# Altium PCB pcb.PCBDOC
Units mm, origin at the board's own origin, x right, y up, seen from the top; angles counter-clockwise.
Board outline 95.9 x 90.2 mm, 2 copper layers (TopLayer, BottomLayer), stack 1.671 mm thick; 69 components, 109 nets, 459 pads, 446 vias.
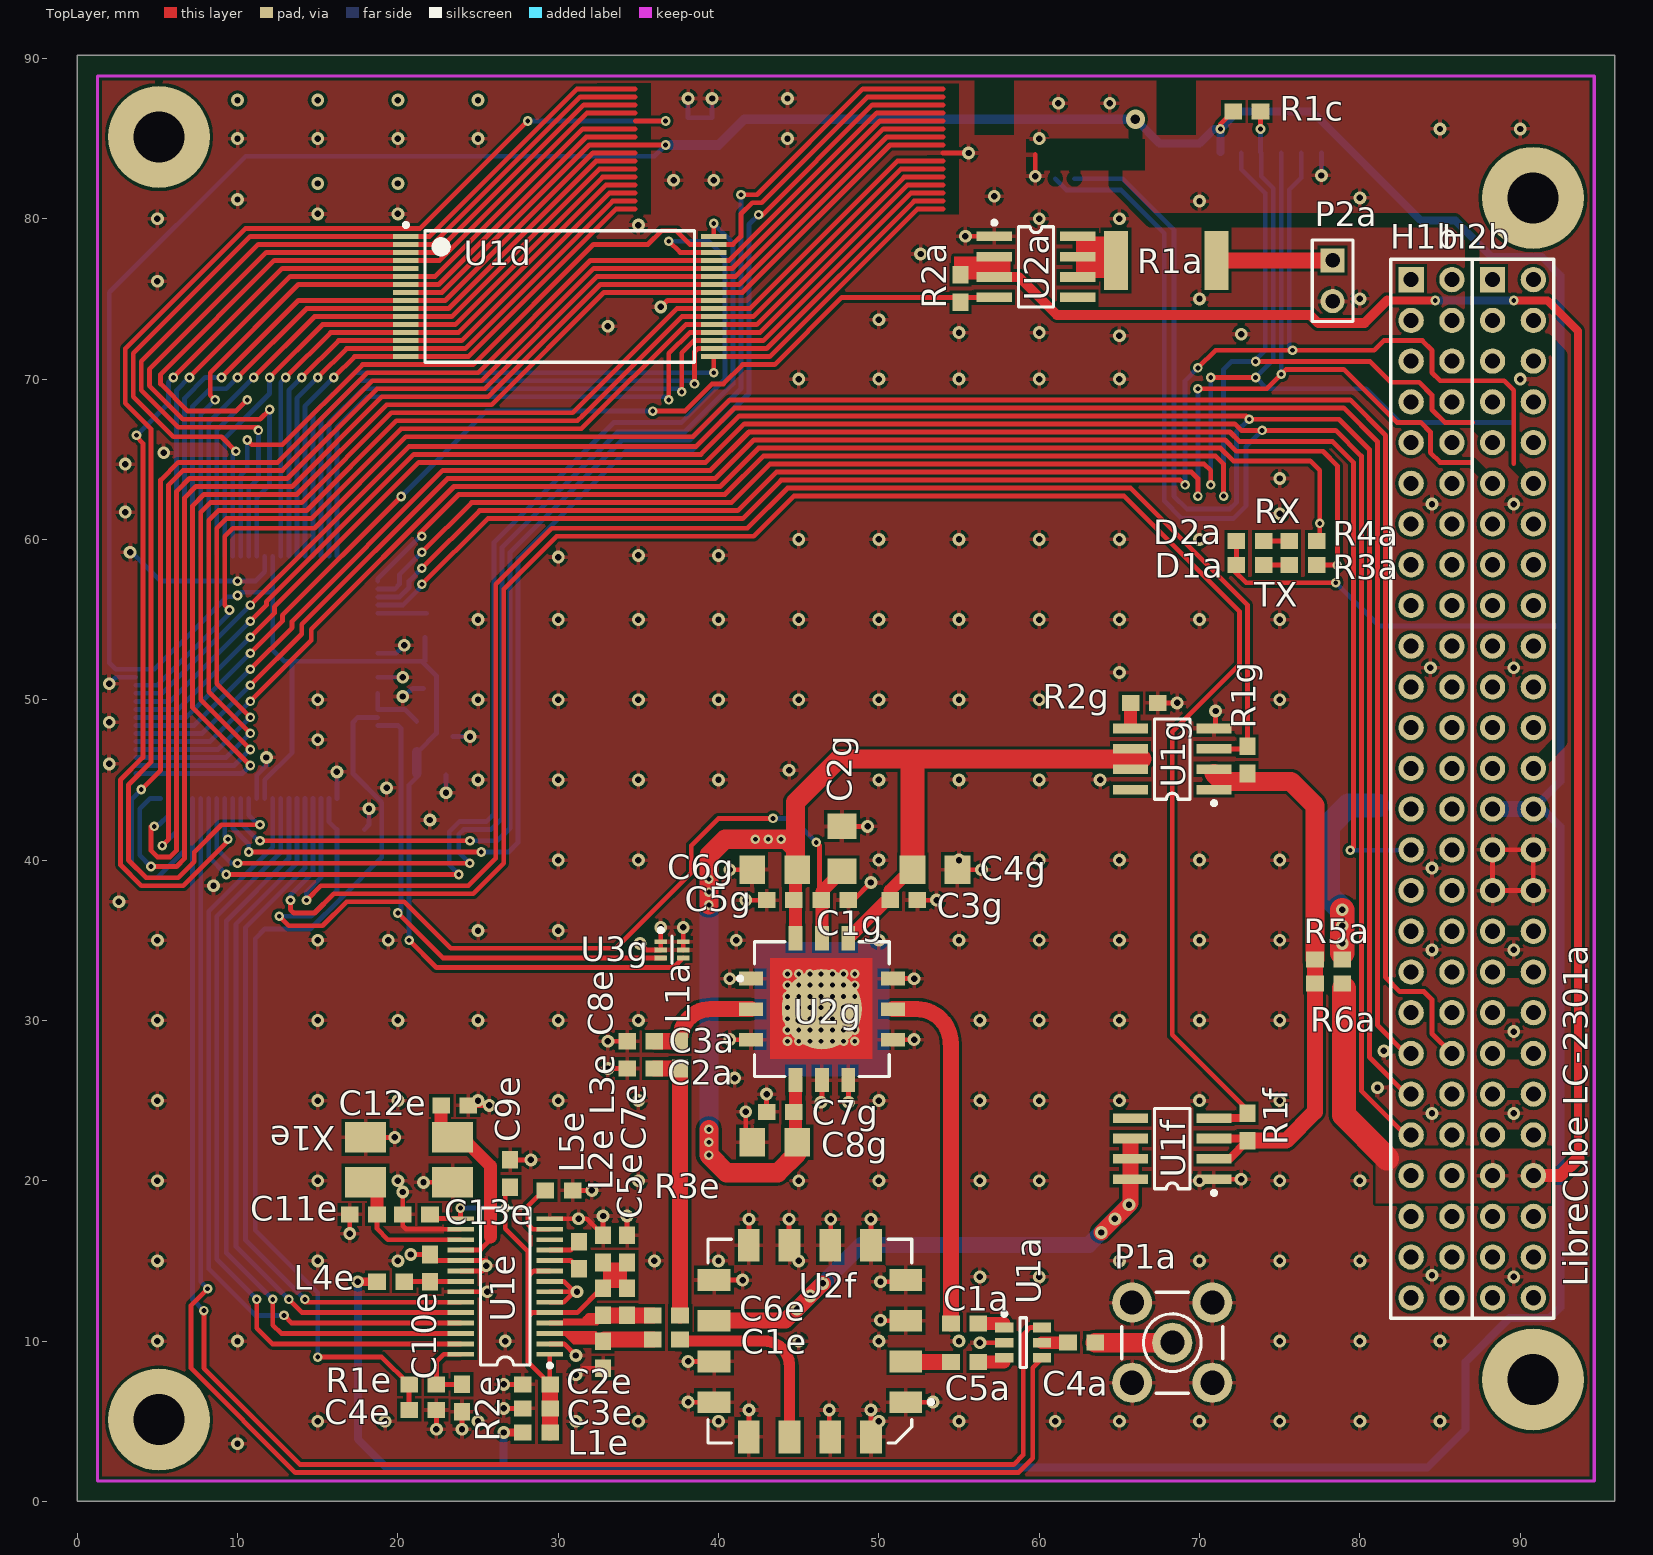
[diagram p0: TopLayer view]
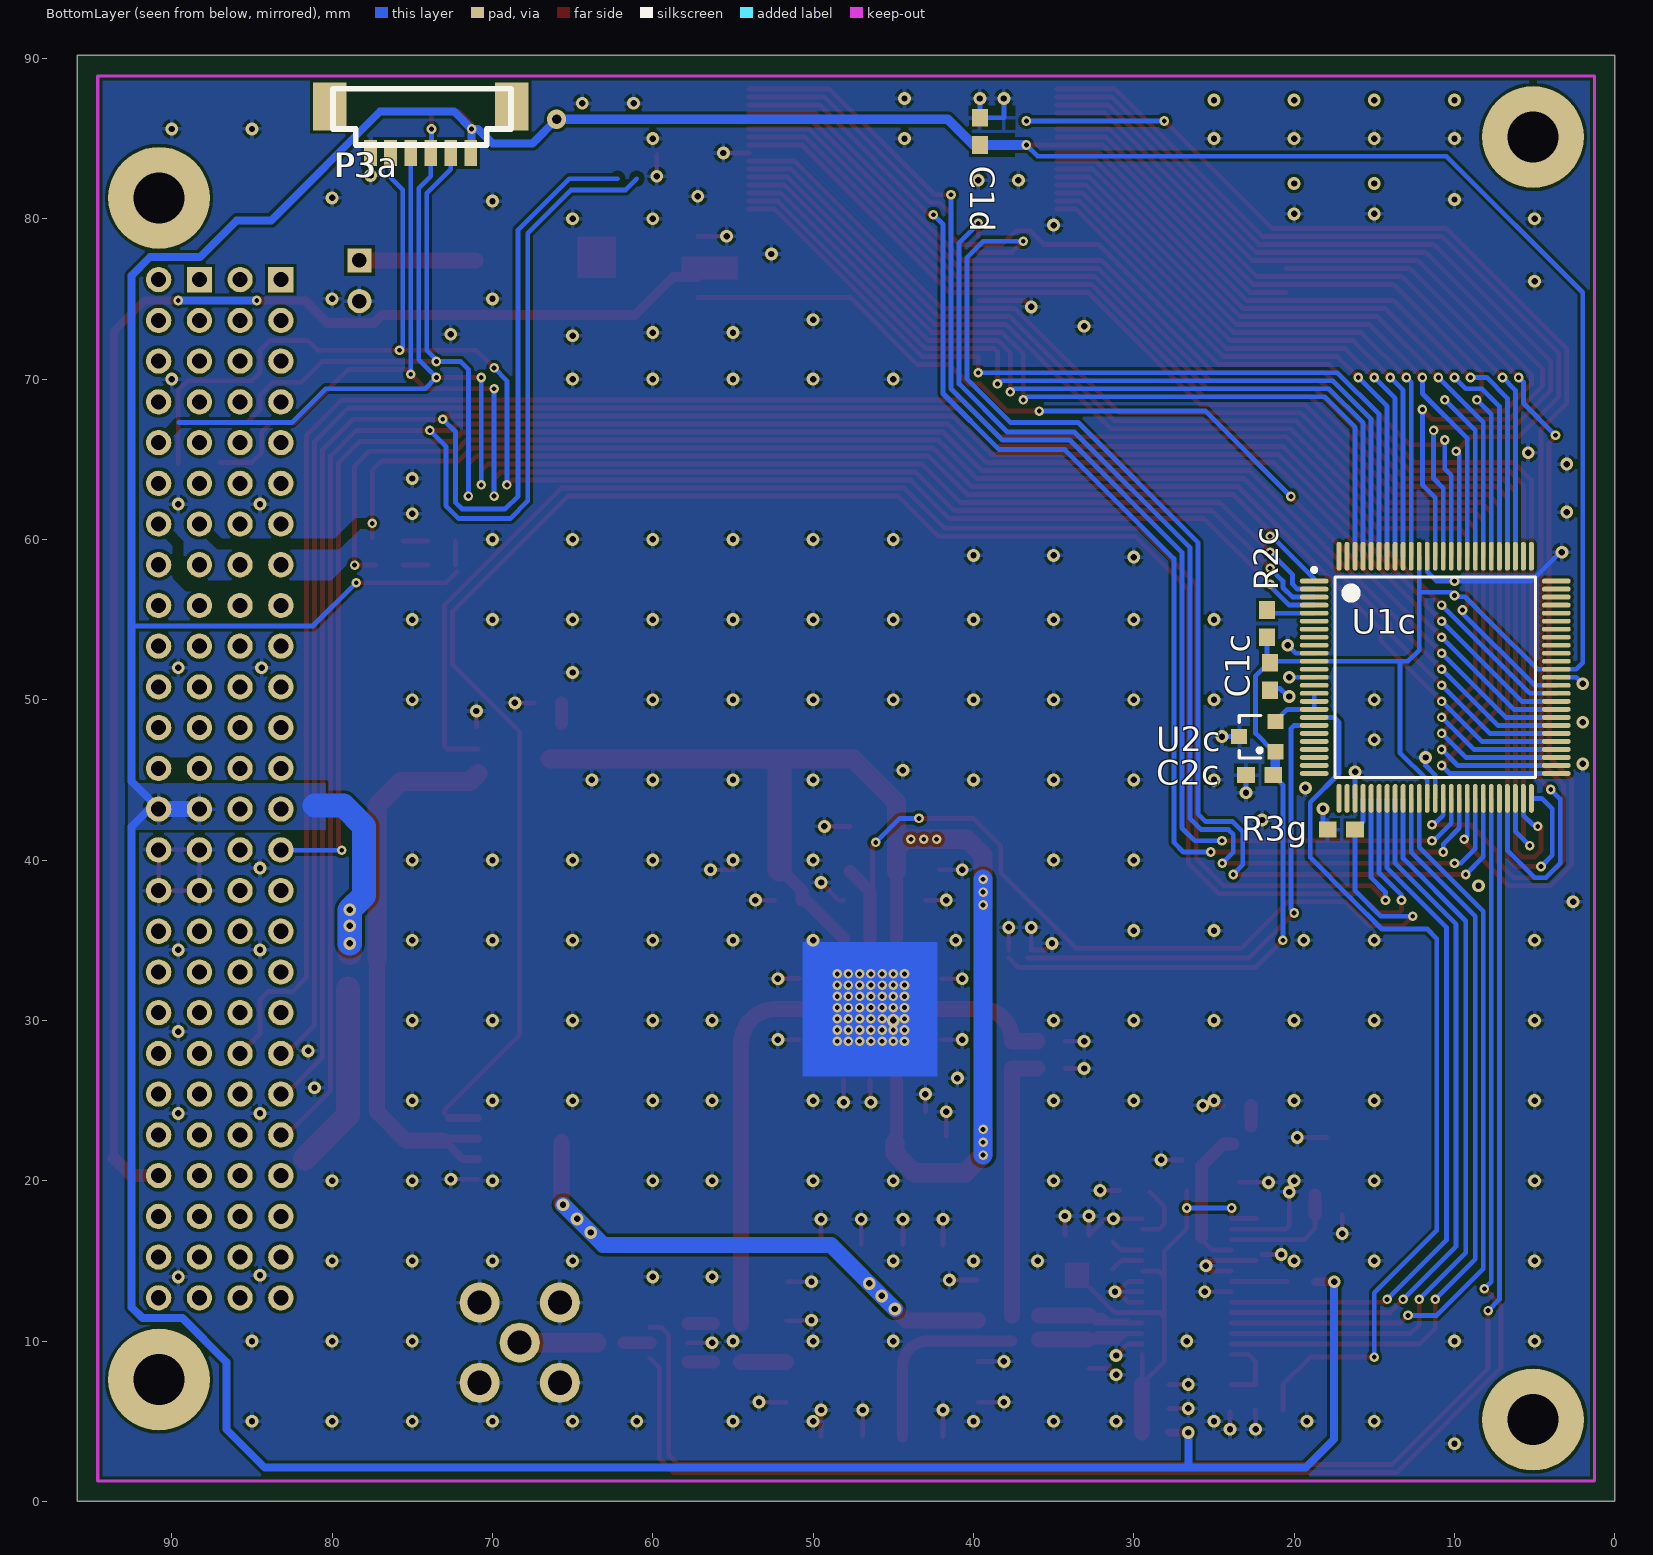
[diagram p1: BottomLayer view, seen from below]

## Layer stack, top to bottom
TopLayer: signal copper 0.0356
Dielectric: core 1.6, FR-4, Dk 4.8
BottomLayer: signal copper 0.0356

## Board outline
0,0 95.9,0 95.9,90.2 0,90.2

## Design rules (kind name [scope] priority, off if disabled: settings)
Clearance [All] p1: gap=0.2
FabricationTestPointUsage TestPointUsage [All] p1: valid=0 allowmultiple=FALSE
FabricationTestpoint Testpoint [All] p1: side=3 testpointundercomponent=TRUE minsize=1.016 maxsize=2.54 preferedsize=1.524 minholesize=0.508 maxholesize=1.016 preferedholesize=0.813 testpointgrid=0.025 allowsidetop=TRUE allowsidebottom=TRUE usegrid=TRUE gridtolerance=0
PlaneClearance [All] p1: clearance=0
PolygonConnect [All] p1: connectstyle=Relief reliefconductorwidth=0.254 reliefentries=4 polygonreliefangle="90 Angle"
RoutingVias [All] p1: holewidth=0.6 width=1.2 viastyle="Through Hole" minholewidth=0.2 minwidth=0.4 maxholewidth=5 maxwidth=10
SMDNeckDown [All] p1: percent=90.000
SilkscreenOverComponentPads [All] p1: minsilkscreentomaskgap=0.254
SolderMaskExpansion [All] p1: expansion=0.102
Width [All] p1: maxlimit=10 minlimit=0.2 preferedwidth=0.4
24 further rules are at their usual default settings.

## Classes and differential pairs
component class "Low noise amplifier module (LNAM)": R1f U1f U2f
component class "CubeSat Board Connector (CBC)": H1b H2b
component class "High power amplifier module (HPAM)": C1g C2g C3g C4g C5g C6g C7g C8g R1g R2g R3g U1g U2g U3g
component class "Memory module (MEM)": C1d C2d U1d U2d
component class "Microcontroller module (MCM)": C1c C2c P3a R1c R2c U1c U2c
component class "Transceiver module (TRXM)": C1e C2e C3e C4e C5e C6e C7e C8e C9e C10e C11e C12e C13e L1e L2e L3e L4e L5e R1e R2e R3e U1e X1e
component class main: C1a C2a C3a C4a C5a D1 D1a D2 D2a D3 D4 D5 D6 D7 D8 D9 D10 L1a P1a P2a P4a R1a R2a R3 R3a R4 R4a R5 R5a R6 R6a R7 R8 R9 R10 R11 R12 U1a U2a

## Components (designator, comment, footprint, x,y, rotation, side; value= is the part's Value field where it differs from the comment)
C1a "0.1 uF" 0603 54.5,11.1 r0 top
C1c "0.1 uF" 0603 21.5,50.6 r90 bottom
C1d "0.1 uF" 0603 39.6,86.3 r270 bottom
C1e "15 pF" 0603 37.6,10.1 r180 top
C1g "0.01 uF" 0603 48.1,37.5 r180 top
C2a "18 pF" 0603 34.3,27 r0 top
C2c "0.47 uF" 0603 21.3,45.3 r0 bottom
C2e "12 pF" 0603 27.8,7.3 r0 top
C2g "10 uF" 1206 47.7,42.1 r270 top
C3a "20 pF" 0603 34.3,28.7 r0 top
C3e "220 pF" 0603 27.8,5.8 r0 top
C3g "0.01 uF" 0603 52.4,37.5 r180 top
C4a "0.1 uF" 0603 63.5,9.9 r180 top
C4e "1 uF" 0603 22.4,5.7 r180 top
C4g "10 uF" 1206 54.9,39.4 r180 top
C5a "0.1 uF" 0603 54.5,8.7 r0 top
C5e "8.2 pF" 0603 34.3,11.6 r90 top
C5g "0.01 uF" 0603 43,37.5 r0 top
C6e "5.6 pF" 0603 37.6,11.6 r180 top
C6g "10 uF" 1206 42.1,39.4 r0 top
C7e "3.3 uF" 0603 34.3,16.6 r270 top
C7g "0.01 uF" 0603 43,24.3 r0 top
C8e "1 nF" 0603 32.8,16.6 r270 top
C8g "10 uF" 1206 42.1,22.4 r0 top
C9e "33 nF" 0603 27,19.6 r90 top
C10e "1 nF" 0603 22,15.4 r270 top
C11e "18 pF" 0603 17,17.9 r0 top
C12e "18 pF" 0603 24.4,24.7 r180 top
C13e "68 pF" 0603 20.3,17.9 r0 top
D1a "LED" 0603 72.3,58.4 r0 top
D2a "LED" 0603 72.3,59.9 r0 top
H1b "CSC Header" CUBESAT_CON 83.2,76.2 r0 top locked
H2b "CSC Header" CUBESAT_CON 88.28,76.2 r0 top locked
L1a "12 nH" 0603 37.6,27 r90 top
L1e "BLM18HG102SN1D" 0603 29.5,4.3 r180 top
L2e "68 nH" 0603 32.8,8.3 r90 top
L3e "6.2 nH" 0603 32.8,11.6 r90 top
L4e "BLM18HG102SN1D" 0603 20.4,13.7 r180 top
L5e "33 nH" 0603 31.3,16.2 r270 top
P1a "SMA" SMA 68.3,9.9 r0 top
P2a "Header 2" HDR1X2 78.3,77.4 r270 top
P3a "MICRO-06-R-SMT" MICRO-06-R-SMT 71.35,84.1 r0 bottom
R1a "0.1 r" 2512 64.8,77.4 r0 top
R1c "4.75 k" 0603 73.8,86.7 r180 top
R1e "10 k" 0603 20.7,7.3 r0 top
R1f "10 k" 0603 73,24.2 r270 top
R1g "10 k" 0603 73,45.4 r90 top
R2a "10 k" 0603 55.1,74.8 r90 top
R2c "100 k" 0603 21.7,55.6 r270 bottom
R2e "27 k" 0603 24,5.6 r90 top
R2g "1.1 k" 0603 65.7,49.8 r0 top
R3a "1.5k" 0603 75.6,58.4 r0 top
R3e "82 k +/- 1%" 0603 30.9,19.4 r180 top
R3g "10 k" 0603 17.9,41.9 r180 bottom
R4a "1.5k" 0603 75.6,59.9 r0 top
R5a "0 r" 0603 77.2,33.8 r0 top
R6a "0 r" 0603 77.2,32.3 r0 top
U1a "AS193-73" SOT-6 59,9.9 r0 top
U1c "C8051F120" TQFP-100 11.2,51.4 r180 bottom
U1d "IS62WV5128BLL-55TI" TSOP-32 20.5,78.9 r0 top
U1e "CC1000" TSSOP-28 26.7,13.4 r90 top
U1f "TPS2024D" SO-8 68.3,22 r90 top
U1g "MAX893L" SO-8 68.3,46.3 r90 top
U2a "TPS2024D" SO-8 59.8,77 r270 top
U2c "REF3130" SOT23-3 22.3,47.7 r90 bottom
U2f "RAMP-33LN+" CK605 45.7,10 r180 top
U2g "SKY65116" MCM-12 46.45,30.7 r0 top
U3g "TMP20" SOT563-6 37.1,34.4 r0 top
X1e "14.7456MHz_16pF" XTAL_ABMM2 20.7,21.3 r0 top

## Footprints (in the part's own frame and the unit in brackets; to place one, negate y for a bottom-side part, rotate by r counter-clockwise, add the part's x,y. Pads: shape width x height; smd on the part's side, far side on the other; paste and mask are expansions set on the pad)
0603 [mm] "Chip Capacitor; Body 1.6 x 0.8 mm (LxW typ)"
  rect 1.1x1 smd: 1(0,0) 2(1.7,0)
1206 [mm] "Chip Capacitor; Body 3.2 x 1.6 mm (LxW typ)"
  rect 1.6x1.8 smd: 1(0,0) 2(2.8,0)
2512 [mm]
  rect 1.5x3.7 smd: 1(0,0) 2(6.25,0)
CK605 [mm]
  rect 2.05x1.35 smd: 1(-5.975,3.81) 2(-5.975,1.27) 3(-5.975,-1.27) 4(-5.975,-3.81) 9(5.975,-3.81) 10(5.975,-1.27) 11(5.975,1.27) 12(5.975,3.81)
  rect 1.35x2.05 smd: 5(-3.81,-5.975) 6(-1.27,-5.975) 7(1.27,-5.975) 8(3.81,-5.975) 13(3.81,5.975) 14(1.27,5.975) 15(-1.27,5.975) 16(-3.81,5.975)
  silkscreen extent -7.68,-6.35 6.35,6.35
CUBESAT_CON [mm]
  rect 1.575x1.575 hole 0.94: 1(0,0)
  round 1.575 hole 0.94: 2(2.54,0) 3(0,-2.54) 4(2.54,-2.54) 5(0,-5.08) 6(2.54,-5.08) 7(0,-7.62) 8(2.54,-7.62) 9(0,-10.16) 10(2.54,-10.16) 11(0,-12.7) 12(2.54,-12.7) 13(0,-15.24) 14(2.54,-15.24) 15(0,-17.78) 16(2.54,-17.78) 17(0,-20.32) 18(2.54,-20.32) 19(0,-22.86) 20(2.54,-22.86) 21(0,-25.4) 22(2.54,-25.4) 23(0,-27.94) 24(2.54,-27.94) 25(0,-30.48) 26(2.54,-30.48) 27(0,-33.02) 28(2.54,-33.02) 29(0,-35.56) 30(2.54,-35.56) 31(0,-38.1) 32(2.54,-38.1) 33(0,-40.64) 34(2.54,-40.64) 35(0,-43.18) 36(2.54,-43.18) 37(0,-45.72) 38(2.54,-45.72) 39(0,-48.26) 40(2.54,-48.26) 41(0,-50.8) 42(2.54,-50.8) 43(0,-53.34) 44(2.54,-53.34) 45(0,-55.88) 46(2.54,-55.88) 47(0,-58.42) 48(2.54,-58.42) 49(0,-60.96) 50(2.54,-60.96) 51(0,-63.5) 52(2.54,-63.5)
  silkscreen extent -1.27,-64.77 3.81,1.27
HDR1X2 [mm] "Connector; Header; 2 Position"
  rect 1.5x1.5 hole 0.9: 1(0,0)
  round 1.5 hole 0.9: 2(2.54,0)
  silkscreen extent -1.27,-1.27 3.81,1.27
MCM-12 [mm] "QFN, 12-Leads, Body 8.4x8.4mm (max), Pitch 1.65mm, Pitch1 1.91mm, IPC Medium Density"
  rect 1.5x0.85 smd: 1(-4.425,1.91) 2(-4.425,0) 3(-4.425,-1.91) 7(4.425,-1.91) 8(4.425,0) 9(4.425,1.91)
  round 5 smd: 1(0,0)
  rect 0.85x1.5 smd: 4(-1.65,-4.425) 5(0,-4.425) 6(1.65,-4.425) 10(1.65,4.425) 11(0,4.425) 12(-1.65,4.425)
  silkscreen extent -5.22,-4.2 4.2,4.2
MICRO-06-R-SMT [mm]
  rect 0.8x1.6 smd: 1(0,0) 2(1.25,0) 3(2.5,0) 4(3.75,0) 5(5,0) 6(6.25,0)
  rect 2.1x3 smd: ""(-2.55,-2.9) ""(8.8,-2.9)
  silkscreen extent -2.5,-4 8.6,-0.5
SMA [mm] "Connector; SMA"
  round 2.5 hole 1.5: 1(0,0) 2(-2.5,-2.5) 2(-2.5,2.5) 2(2.5,-2.5) 2(2.5,2.5)
  silkscreen extent -3.15,-3.15 3.15,3.15
SO-8 [mm] "Small Outline; 8 Leads; Body Width 3.9 mm; Pitch 1.27 mm"
  rect 0.6x2.2 smd: 1(-1.905,-2.6) 2(-0.635,-2.6) 3(0.635,-2.6) 4(1.905,-2.6) 5(1.905,2.6) 6(0.635,2.6) 7(-0.635,2.6) 8(-1.905,2.6)
  silkscreen extent -2.88,-2.72 2.5,1.1
SOT23-3 [mm] "SOT-23; 3 Leads; Body 3.0 x 2.5 mm, inc. leads (LxW max)"
  rect 0.95x1 smd: 1(-0.95,-1.125) 2(0.95,-1.125) 3(0,1.125)
  silkscreen extent -1.33,-0.27 1.32,1.13
SOT563-6 [mm]
  rect 0.8x0.3 smd: 1(-0.7,0.5) 2(-0.7,0) 3(-0.7,-0.5) 4(0.7,-0.5) 5(0.7,0) 6(0.7,0.5)
  silkscreen extent -0.82,-0.85 0,1.35, body extent -0.65,-0.85 0.65,0.85, height 0.6
SOT-6 [mm] "SOT23, 6-Leads, Body 3.1x3.2mm (max), Pitch 0.95mm, IPC Medium Density"
  rect 1.15x0.6 smd: 1(-1.175,0.95) 2(-1.175,0) 3(-1.175,-0.95) 4(1.175,-0.95) 5(1.175,0) 6(1.175,0.95)
  silkscreen extent -1.3,-1.55 0.2,1.92
TQFP-100 [mm] "100-Pin Thin Quad Flat Pack 0.5 mm Pitch, IPC Medium Density"
  oval 1.8x0.3 smd: 1(-7.55,6) 2(-7.55,5.5) 3(-7.55,5) 4(-7.55,4.5) 5(-7.55,4) 6(-7.55,3.5) 7(-7.55,3) 8(-7.55,2.5) 9(-7.55,2) 10(-7.55,1.5) 11(-7.55,1) 12(-7.55,0.5) 13(-7.55,0) 14(-7.55,-0.5) 15(-7.55,-1) 16(-7.55,-1.5) 17(-7.55,-2) 18(-7.55,-2.5) 19(-7.55,-3) 20(-7.55,-3.5) 21(-7.55,-4) 22(-7.55,-4.5) 23(-7.55,-5) 24(-7.55,-5.5) 25(-7.55,-6) 51(7.55,-6) 52(7.55,-5.5) 53(7.55,-5) 54(7.55,-4.5) 55(7.55,-4) 56(7.55,-3.5) 57(7.55,-3) 58(7.55,-2.5) 59(7.55,-2) 60(7.55,-1.5) 61(7.55,-1) 62(7.55,-0.5) 63(7.55,0) 64(7.55,0.5) 65(7.55,1) 66(7.55,1.5) 67(7.55,2) 68(7.55,2.5) 69(7.55,3) 70(7.55,3.5) 71(7.55,4) 72(7.55,4.5) 73(7.55,5) 74(7.55,5.5) 75(7.55,6)
  oval 0.3x1.8 smd: 26(-6,-7.55) 27(-5.5,-7.55) 28(-5,-7.55) 29(-4.5,-7.55) 30(-4,-7.55) 31(-3.5,-7.55) 32(-3,-7.55) 33(-2.5,-7.55) 34(-2,-7.55) 35(-1.5,-7.55) 36(-1,-7.55) 37(-0.5,-7.55) 38(0,-7.55) 39(0.5,-7.55) 40(1,-7.55) 41(1.5,-7.55) 42(2,-7.55) 43(2.5,-7.55) 44(3,-7.55) 45(3.5,-7.55) 46(4,-7.55) 47(4.5,-7.55) 48(5,-7.55) 49(5.5,-7.55) 50(6,-7.55) 76(6,7.55) 77(5.5,7.55) 78(5,7.55) 79(4.5,7.55) 80(4,7.55) 81(3.5,7.55) 82(3,7.55) 83(2.5,7.55) 84(2,7.55) 85(1.5,7.55) 86(1,7.55) 87(0.5,7.55) 88(0,7.55) 89(-0.5,7.55) 90(-1,7.55) 91(-1.5,7.55) 92(-2,7.55) 93(-2.5,7.55) 94(-3,7.55) 95(-3.5,7.55) 96(-4,7.55) 97(-4.5,7.55) 98(-5,7.55) 99(-5.5,7.55) 100(-6,7.55)
  silkscreen extent -7.68,-6.25 6.25,6.82
TSOP-32 [mm]
  rect 1.6x0.3 smd: 1(0,0) 2(0,-0.5) 3(0,-1) 4(0,-1.5) 5(0,-2) 6(0,-2.5) 7(0,-3) 8(0,-3.5) 9(0,-4) 10(0,-4.5) 11(0,-5) 12(0,-5.5) 13(0,-6) 14(0,-6.5) 15(0,-7) 16(0,-7.5) 17(19.2,-7.5) 18(19.2,-7) 19(19.2,-6.5) 20(19.2,-6) 21(19.2,-5.5) 22(19.2,-5) 23(19.2,-4.5) 24(19.2,-4) 25(19.2,-3.5) 26(19.2,-3) 27(19.2,-2.5) 28(19.2,-2) 29(19.2,-1.5) 30(19.2,-1) 31(19.2,-0.5) 32(19.2,0)
  silkscreen extent -0.12,-7.85 18,0.83
TSSOP-28 [mm] "Shrink Small Outline; 28 Leads; Body Width 4.4 mm; Pitch 0.65 mm"
  rect 0.3x1.65 smd: 1(-4.225,-2.775) 2(-3.575,-2.775) 3(-2.925,-2.775) 4(-2.275,-2.775) 5(-1.625,-2.775) 6(-0.975,-2.775) 7(-0.325,-2.775) 8(0.325,-2.775) 9(0.975,-2.775) 10(1.625,-2.775) 11(2.275,-2.775) 12(2.925,-2.775) 13(3.575,-2.775) 14(4.225,-2.775) 15(4.225,2.775) 16(3.575,2.775) 17(2.925,2.775) 18(2.275,2.775) 19(1.625,2.775) 20(0.975,2.775) 21(0.325,2.775) 22(-0.325,2.775) 23(-0.975,2.775) 24(-1.625,2.775) 25(-2.275,2.775) 26(-2.925,2.775) 27(-3.575,2.775) 28(-4.225,2.775)
  silkscreen extent -5.05,-2.9 4.9,1.55
XTAL_ABMM2 [mm]
  rect 2.575x1.9 smd: 0(-2.712,1.4) 0(2.713,-1.4) 1(-2.712,-1.4) 2(2.713,1.4)

## Part data
C1a C1g C2a C2g C3a C3g C4a C4g C5a C5g C6g C7g C8g: library part Capacitor, "Capacitor"
C1c C1d C2c: library part Cap
C1e C2e C3e C4e C5e C6e C7e C8e C9e C10e C11e C12e C13e: library part CAP, "Capacitor"
D1a D2a: "Typical INFRARED GaAs LED"
H1b H2b: library part "CubeSat Connector"
L1a L1e L2e L3e L4e: library part Inductor, "Inductor"
L5e: library part Inductor, "Inductor LQW18AN27NJ00D"
P1a: "SMA Connector"
P2a: "Header, 2-Pin"
P3a: library part MICRO-06, "Micro Connector"
R1a R1g R2g R3a R3g R4a R5a R6a: library part Resistor, "Resistor"
R1c R2c: library part Res
R1e R2e R3e: library part Res1, "Resistor"
R1f R2a: library part Res1
U1a: "RF SPDT Switch"
U1c: "Microcontroller"
U1f U2a: library part TPS2024, "296-2564-5-ND"
U2c: "296-17098-1-ND"
U2g: "Linear RF Power Amplifier"
X1e: library part XTAL, "Crystal Oscillator"

## Free pads (board coordinates)
  round 6.35 hole 3.175: 1(5.1,5.1) 2(90.8,81.3) 3(90.8,7.6) 4(5.1,85.1)

## Via types
v1: diameter 0.8, hole 0.4, TopLayer to BottomLayer, 287 vias
v2: diameter 0.6, hole 0.3, TopLayer to BottomLayer, 158 vias
v3: diameter 1.2, hole 0.6, TopLayer to BottomLayer, 1 vias

## Nets (pads, with @x,y where several pads share a name; then routed paths per layer and width w, separated by ;. In a path a pad name is that pad's centre, name@x,y a point inside that pad or via, vN(x,y) a via of type N, cw(c..) or ccw(c..) an arc to the next point about the centre after c; other vN are vias at no path point)
+3.3V: C1c.2 C1d.2 C2c.1 D1a.1 D2a.1 H2b.27 H2b.28 L1e.2 L4e.2 P3a.1 R1c.2 R2c.2 R5a.2 U1c.11 U1c.37 U1c.64 U1c.90 U1d.8 U2c.1 U3g.4 | length 423.6
  TopLayer w0.3: U1d.8 22.743,75.4 31.943,84.6 34.8,84.6 v2(36.7,84.6) ; v2(20.7,35) 22.4,33.3 37.2,33.3 U3g.4 ; v2(71.3,85.6) 71.3,85.9 R1c.2 ; D1a.1@72.2,58 72.9,57.3 v2(78.5,57.3) ; D1a.1 D2a.1
  TopLayer w0.5: v1(17.5,13.7) L4e.2 ; v1(26.6,4.3) L1e.2
  TopLayer w1.5: R5a.2@78.9,34.2 v1(78.9,36.9)
  BottomLayer w0.3: v2@9.925,56.425 9.344,56.425 7.7,54.781 4.819,51.9 U1c.64 2.4,51.9 2,52.3 2,75.4 10.5,83.9 36,83.9 v2(36.7,84.6) ; v2(10,56.5) 10.2,56.7 12.2,56.7 ; U1c.37 11.7,45 13.4,46.7 13.4,52.4 ; U1c.90 12.2,56.7 ; v2(20.7,35) 20.7,44.7 C2c.1 ; U2c.1@21.3,46.8 22.4,47.9 22.4,51.5 C1c.2@21.5,52.4 ; C1c.2@21.7,52.4 U1c.11 16.5,52.4 12.9,52.4 12.2,53.1 12.2,56.7 ; C1c.2@21.7,52.5 R2c.2 ; v2(78.5,57.3) 81.2,54.6 92.5,54.6
  BottomLayer w0.5: v1(17.5,13.7) 17.5,3.9 19.3,2.1 84.2,2.1 86.6,4.5 86.6,8.7 89.33,11.43 91.83,11.43 92.5,12.1 92.5,15.8 92.5,42.1 91.1,43.5 92.5,44.9 92.5,76.47 91.37,77.6 88.25,77.6 85.95,79.9 83.8,79.9 77,86.7 72.4,86.7 v2(71.3,85.6) ; 26.6,2.1 v1(26.6,4.3) ; v3(66,86.2) 67.5,84.7 70,84.7 70.9,85.6 v2(71.3,85.6) ; P3a.1@71.3,84.15 v2(71.3,85.6)
  BottomLayer w0.6: C2c.1@21.175,45.425 U2c.1 ; v2(36.7,84.6) 40,84.6 41.6,86.2 55.7,86.2 v3(66,86.2)
  BottomLayer w1: H2b.27 H2b.28
  BottomLayer w1.5: v1(78.9,34.8) v1(78.9,36.9) 78,37.8 78,42.1 79.3,43.4 81.1,43.4
  other v1: 78.9,35.9
-ANT_DEPLOY: R2a.1 U1c.58 U2a.4 | length 64.6
  TopLayer w0.3: v2(10.8,52.9) 12.8,54.9 12.8,55.275 v2(20.2,62.675) ; v2(35.9,68) 37.9,68 39.6,69.7 40.3,69.7 41.5,70.9 43.5,70.9 47.695,75.095 U2a.4
  BottomLayer w0.3: U1c.58 6.8,48.9 v2(10.8,52.9) ; v2(20.2,62.675) 25.525,68 v2(35.9,68)
-HPA_ON: R1g.2 U1c.30 U1g.3 | length 99.8
  TopLayer w0.3: v2(14.3,37.5) 15.2,38.4 24.4,38.4 26.1,40.1 26.1,57.2 29.6,60.7 41.8,60.7 44.3,63.2 65.7,63.2 73,55.9 R1g.2 ; U1g.3 R1g.2@72.835,46.935
  BottomLayer w0.3: v2(14.3,37.5) 14.3,38 15.2,38.9 U1c.30
-LNA_ON: R1f.1 U1c.31 U1f.4 | length 127.4
  TopLayer w0.3: v2(13.3,37.5) 13.3,36.9 13.5,36.7 14.8,36.7 16,37.9 17.3,37.9 24.7,37.9 26.6,39.8 26.6,56.9 29.9,60.2 42.2,60.2 44.7,62.7 65.3,62.7 72.5,55.5 72.5,52.2 68.3,48 68.3,29.1 73,24.4 R1f.1
  TopLayer w0.5: U1f.4 R1f.1@72.705,23.905
  BottomLayer w0.3: v2(13.3,37.5) 13.3,37.8 14.7,39.2 U1c.31
-MEM_CE: U1c.44 U1d.30 | length 76
  TopLayer w0.3: v2(9.3,39.1) v2(23.8,39.1) ; v2(36.9,78.6) 37.6,77.9 U1d.30
  BottomLayer w0.3: U1c.44 8.2,40.2 v2(9.3,39.1) ; v2(23.8,39.1) 23.2,39.7 23.2,41.763 23.837,42.4 25.5,42.4 26,42.9 26,55.6 26,59.819 33.481,67.3 37.7,67.3 40.4,70 40.4,77.6 39.4,78.6 v2(36.9,78.6)
-MEM_OE: U1c.43 U1d.32 | length 71.3
  TopLayer w0.3: v2(10,39.8) v2(24.481,39.8) ; U1d.32 v2(39.7,79.7)
  BottomLayer w0.3: U1c.43 8.7,40.7 9.6,39.8 v2(10,39.8) ; v2(24.481,39.8) 23.8,40.481 23.8,41.6 24.1,41.9 25.8,41.9 26.5,42.6 26.5,55.3 26.5,59.5 33.7,66.7 37.9,66.7 40.9,69.7 40.9,78.5 v2(39.7,79.7)
-MEM_WE: U1c.42 U1d.5 | length 60.5
  TopLayer w0.3: v2(3.7,66.5) 3.7,66.4 4.1,66 4.1,46.4 2.7,45 2.7,39.7 4,38.4 6.6,38.4 v2@9.45,41.25 ; v2(6,70.1) 12.8,76.9 U1d.5
  BottomLayer w0.3: v2(3.7,66.5) 5.694,68.494 5.694,69.794 v2(6,70.1) ; U1c.42 9.2,41.5 v2(9.4,41.3)
-RESET: H1b.29 U1c.57 | length 112.7
  TopLayer w0.3: v2(10.8,51.9) 13.4,54.5 13.4,54.9 22.8,64.3 39.5,64.3 41.9,66.7 71.9,66.7 72.5,66.1 78.3,66.1 79.6,64.8 79.6,40.81 v2(79.4,40.61)
  BottomLayer w0.3: U1c.57 7.3,48.4 v2(10.8,51.9) ; v2(79.4,40.61) H1b.29@83.3,40.61
-RX_LED: R4a.2 U1c.55 | length 86.6
  TopLayer w0.3: v2(10.8,49.9) 14.6,53.7 14.6,54.4 23.5,63.3 40.1,63.3 42.5,65.7 71.3,65.7 72.1,64.9 76.9,64.9 77.5,64.3 R4a.2@77.5,60.1
  BottomLayer w0.3: U1c.55 8.3,47.4 v2(10.8,49.9)
  other v2: 77.5,61
-TX_LED: R3a.2 U1c.56 | length 91
  TopLayer w0.3: v2(10.8,50.9) 14,54.1 14,54.7 23.1,63.8 39.8,63.8 42.2,66.2 71.591,66.2 72.291,65.5 77.7,65.5 78.6,64.6 v2(78.6,58.4) R3a.2
  BottomLayer w0.3: U1c.56 7.8,47.9 v2(10.8,50.9)
A0: U1c.98 U1d.20 | length 54
  TopLayer w0.3: v2(36.9,68.7) 36.9,71.6 38.2,72.9 42.579,72.9 51.779,82.1 52.4,82.1 54,82.1
  BottomLayer w0.3: U1c.98 16.2,67 18.1,68.9 36.7,68.9 v2(36.9,68.7)
A1: U1c.97 U1d.19 | length 54.2
  TopLayer w0.3: v2(37.7,69.2) 37.7,71.641 38.459,72.4 42.786,72.4 51.986,81.6 54,81.6
  BottomLayer w0.3: U1c.97 15.7,67.272 17.828,69.4 37.5,69.4 v2(37.7,69.2)
A2: U1c.96 U1d.18 | length 54.4
  TopLayer w0.3: v2@38.5,69.6 38.5,71.7 38.7,71.9 42.993,71.9 52.193,81.1 52.4,81.1 54,81.1
  BottomLayer w0.3: U1c.96 15.2,67.5 17.6,69.9 38.3,69.9 v2(38.5,69.7)
A3: U1c.95 U1d.17 | length 53.8
  TopLayer w0.3: v2(39.7,70.4) U1d.17 ; U1d.17@39.9,71.4 43.2,71.4 52.4,80.6 54,80.6
  BottomLayer w0.3: U1c.95 14.7,67.8 17.3,70.4 v2(39.7,70.4)
A4: U1c.94 U1d.16 | length 35
  TopLayer w0.3: v2(16,70.1) 17.3,71.4 24.4,71.4 33.6,80.6 34.8,80.6
  BottomLayer w0.3: U1c.94 14.2,68.3 v2(16,70.1)
A5: U1c.93 U1d.15 | length 36
  TopLayer w0.3: v2(15,70.1) 16.8,71.9 24.193,71.9 33.393,81.1 33.6,81.1 34.8,81.1
  BottomLayer w0.3: U1c.93 13.7,68.8 v2(15,70.1)
A6: U1c.92 U1d.14 | length 37
  TopLayer w0.3: v2(14,70.1) 16.3,72.4 23.986,72.4 33.186,81.6 34.8,81.6
  BottomLayer w0.3: U1c.92 13.2,69.3 v2(14,70.1)
A7: U1c.91 U1d.13 | length 38
  TopLayer w0.3: v2(13,70.1) 15.8,72.9 23.779,72.9 32.979,82.1 33.6,82.1 34.8,82.1
  BottomLayer w0.3: U1c.91 12.7,69.8 v2(13,70.1)
A8: U1c.88 U1d.3 | length 56.2
  TopLayer w0.3: v2(12,68.1) 11.4,67.5 6.594,67.5 4.5,69.594 4.5,70.6 11.8,77.9 22.393,77.9 31.593,87.1 32.4,87.1 34.8,87.1
  BottomLayer w0.3: U1c.88 11.2,62.6 12,63.4 v2(12,68.1)
A9: U1c.87 U1d.2 | length 55.8
  TopLayer w0.3: v2@11.3,67 6.3,67 4,69.3 4,71.1 11.3,78.4 22.186,78.4 31.386,87.6 34.8,87.6
  BottomLayer w0.3: U1c.87 10.7,63.2 11.3,63.8 v2(11.3,66.8)
A10: U1c.86 U1d.31 | length 61.5
  TopLayer w0.3: v2(10.6,66.2) 10.9,65.9 12.8,65.9 17.8,70.9 24.7,70.9 32.2,78.4 35.6,78.4 36.45,79.25 37.35,79.25 38.2,78.4 40.9,78.4 41.4,78.9 41.4,80.3 42.1,81 42.7,81 49.3,87.6 54,87.6
  BottomLayer w0.3: U1c.86 10.2,64 10.6,64.4 v2(10.6,66.2)
A11: U1c.85 U1d.1 | length 55.3
  TopLayer w0.3: v2(9.9,65.5) 9,66.4 6,66.4 3.5,68.9 3.5,71.6 10.8,78.9 21.979,78.9 31.179,88.1 32.4,88.1 34.8,88.1
  BottomLayer w0.3: U1c.85 9.7,65.3 v2(9.9,65.5)
A12: U1c.84 U1d.12 | length 40.3
  TopLayer w0.3: v2(12,70.1) 15.3,73.4 23.572,73.4 32.772,82.6 34.8,82.6
  BottomLayer w0.3: U1c.84 9.2,66.3 12,69.1 v2(12,70.1)
A13: U1c.83 U1d.4 | length 53.7
  TopLayer w0.3: v2(10.6,68.7) 9.9,68 6.9,68 5.2,69.7 5.2,70.3 12.3,77.4 22.6,77.4 31.8,86.6 34.8,86.6
  BottomLayer w0.3: U1c.83@8.7,59.1 8.7,66.8 v2(10.6,68.7)
A14: U1c.82 U1d.11 | length 41.5
  TopLayer w0.3: v2(11,70.1) 14.8,73.9 23.364,73.9 32.564,83.1 33.6,83.1 34.8,83.1
  BottomLayer w0.3: U1c.82 8.2,67.3 v2(11,70.1)
A15: U1c.81 U1d.7 | length 44.5
  TopLayer w0.3: v2(8.6,68.7) 8.3,69 8.3,70.4 13.8,75.9 22.536,75.9 31.736,85.1 33.6,85.1 34.8,85.1
  BottomLayer w0.3: U1c.81 7.7,67.8 v2(8.6,68.7)
A16: U1c.80 U1d.10 | length 43.3
  TopLayer w0.3: v2(10,70.1) 14.3,74.4 23.157,74.4 32.357,83.6 34.8,83.6
  BottomLayer w0.3: U1c.80 7.2,68.3 8.292,69.392 9.292,69.392 v2(10,70.1)
A17: U1c.79 U1d.9 | length 44.3
  TopLayer w0.3: v2(9,70.1) 13.8,74.9 22.95,74.9 32.15,84.1 33.6,84.1 34.8,84.1
  BottomLayer w0.3: U1c.79 6.7,68.8 8,70.1 v2(9,70.1)
A18: U1c.78 U1d.6 | length 45.7
  TopLayer w0.3: v2(7,70.1) 13.3,76.4 22.329,76.4 31.529,85.6 34.8,85.6
  BottomLayer w0.3: U1c.78 6.2,69.3 v2(7,70.1)
AVDD: C2e.2 C3e.2 C5e.2 C7e.2 C8e.2 C9e.1 C13e.2 L1e.1 L3e.2 U1e.1 U1e.5 U1e.9 U1e.15 | length 30
  TopLayer w0.3: C13e.2@22.35,17.65 23.9,17.65 v2(23.9,18.3) ; C9e.1@26.7,19.4 26.7,17 28.1,15.6 28.1,14 ; C2e.2@29.475,7.325 U1e.1 ; U1e.9 28.475,14.375 28.1,14 ; C2e.2 28.1,8.7 28.1,11.5 ; L3e.2@32.7,13.3 31.175,11.775 U1e.5 28.375,11.775 28.1,11.5 ; 28.1,11.5 28.1,14
  TopLayer w1: L1e.1 C2e.2
  BottomLayer w0.3: v2(23.9,18.3) v2(26.7,18.3)
D0: U1c.54 U1d.21 | length 75
  TopLayer w0.3: v2(10.8,48.9) 8.7,51 8.7,60.7 9.3,61.3 14.6,61.3 20.2,66.9 31.45,66.9 37.95,73.4 42.372,73.4 51.572,82.6 54,82.6
  BottomLayer w0.3: U1c.54 8.8,46.9 v2(10.8,48.9)
D1: U1c.53 U1d.22 | length 77
  TopLayer w0.3: v2(10.8,47.9) 8.2,50.5 8.2,61.2 8.8,61.8 14.3,61.8 19.9,67.4 31.2,67.4 31.525,67.725 37.7,73.9 42.164,73.9 51.364,83.1 52.4,83.1 54,83.1
  BottomLayer w0.3: U1c.53 9.3,46.4 v2(10.8,47.9)
D2: U1c.52 U1d.23 | length 79
  TopLayer w0.3: v2(10.8,46.9) 7.7,50 7.7,61.7 8.3,62.3 14,62.3 19.6,67.9 30.9,67.9 37.4,74.4 41.957,74.4 51.157,83.6 54,83.6
  BottomLayer w0.3: U1c.52 9.8,45.9 v2(10.8,46.9)
D3: U1c.51 U1d.25 | length 81.2
  TopLayer w0.3: v2(10.8,45.9) 7.2,49.5 7.2,62.1 7.9,62.8 13.7,62.8 19.3,68.4 25.843,68.4 32.843,75.4 37.593,75.4 37.8,75.4 41.493,75.4 50.693,84.6 52.4,84.6 54,84.6
  BottomLayer w0.3: U1c.51 10.3,45.4 v2(10.8,45.9)
D4: U1c.50 U1d.26 | length 86.9
  TopLayer w0.3: v2(4.6,39.6) 6.2,39.6 6.7,40.1 6.7,62.6 7.4,63.3 13.4,63.3 19,68.9 25.636,68.9 26.152,69.416 32.636,75.9 37.386,75.9 37.593,75.9 37.8,75.9 41.286,75.9 50.486,85.1 52.193,85.1 52.4,85.1 54,85.1
  BottomLayer w0.3: v2(4.6,39.6) 3.9,40.3 3.9,43.2 4.55,43.85 U1c.50
D5: U1c.49 U1d.27 | length 84.9
  TopLayer w0.3: v2@4.6,42.1 4.6,40.6 5,40.2 5.8,40.2 6.2,40.6 6.2,63 7,63.8 13.1,63.8 18.7,69.4 25.429,69.4 32.429,76.4 37.179,76.4 37.386,76.4 ; 37.386,76.4 41.079,76.4 50.279,85.6 51.986,85.6 54,85.6
  BottomLayer w0.3: 5.1,42.2 5.7,42.8 U1c.49
  other v2: 4.8,42.1
D6: U1c.48 U1d.28 | length 83.7
  TopLayer w0.3: v2(5.3,40.9) 5.7,41.3 5.7,63.4 6.6,64.3 12.8,64.3 18.4,69.9 25.222,69.9 32.222,76.9 36.972,76.9 37.179,76.9 37.8,76.9 40.872,76.9 50.072,86.1 51.779,86.1 52.4,86.1 54,86.1
  BottomLayer w0.3: v2(5.3,40.9) 6.2,41.8 U1c.48
D7: U1c.47 U1d.29 | length 90.6
  TopLayer w0.3: v2(4,44.4) 5.2,45.6 5.2,63.7 6.3,64.8 12.5,64.8 18.1,70.4 25.015,70.4 32.015,77.4 36.764,77.4 36.972,77.4 40.665,77.4 49.864,86.6 51.572,86.6 54,86.6
  BottomLayer w0.3: v2(4,44.4) 3.4,43.8 3.4,39.8 4.3,38.9 5,38.9 6.7,40.6 U1c.47
DCLK: U1c.33 U1e.24 | length 45.3
  TopLayer w0.3: v2(13.2,12.6) 14.025,11.775 U1e.24
  BottomLayer w0.3: v2(13.2,12.6) 9.9,15.9 9.9,36 13.7,39.8 U1c.33
DIO: U1c.32 U1e.23 | length 44
  TopLayer w0.3: v2@14.2,12.425 U1e.23
  BottomLayer w0.3: v2(14.2,12.6) 10.5,16.3 10.5,35.8 14.2,39.5 U1c.32
DUPLEX_RX: U1a.4 U1c.45 | length 98.2
  TopLayer w0.3: v2(8.135,13.265) 7.1,12.23 7.1,8.3 13.6,1.8 58.7,1.8 59.6,2.7 59.6,8.325 U1a.4@60.2,8.925
  BottomLayer w0.3: U1c.45 7.7,13.7 v2(8.135,13.265)
DUPLEX_TX: U1a.6 U1c.46 | length 98.5
  TopLayer w0.3: v2(7.9,11.9) 7.9,8.3 13.9,2.3 58.4,2.3 59,2.9 59,10.4 59.45,10.85 U1a.6
  BottomLayer w0.3: U1c.46 7.2,12.6 v2(7.9,11.9)
GND: C1c.1 C1d.1 C1g.1 C2a.1 C2c.2 C2e.1 C2g.1 C3a.1 C3e.1 C3g.1 C4e.1 C4g.1 C5g.1 C6g.1 C7e.1 C7g.1 C8e.1 C8g.1 C9e.2 C10e.1 C11e.1 C12e.1 C13e.1 H2b.29 H2b.30 H2b.31 H2b.32 L2e.1 P1a.2 P2a.2 P3a.6 R2e.1 R2g.2 R3e.1 R3g.1 U1a.2 U1c.10 U1c.13 U1c.28 U1c.38 U1c.63 U1c.89 U1d.24 U1e.2 U1e.6 U1e.7 U1e.8 U1e.14 U1e.16 U1e.19 U1e.20 U1e.22 U1f.1 U1g.4 U2a.1 U2c.3 U2f.1 U2f.3 U2f.4 U2f.5 U2f.6 U2f.7 U2f.8 U2f.9 U2f.11 U2f.12 U2f.13 U2f.15 U2f.16 U2g.1 U2g.3 U2g.5 U2g.6 U2g.7 U2g.9 U3g.1 U3g.2 U3g.5 U3g.6 X1e.0 | length 144.6
  TopLayer w0.3: v1(17,16.7) C11e.1 ; X1e.0@17.988,22.7 v1(19.8,22.7) ; v1(20.3,19.3) C13e.1 20.3,17.2 20.525,16.975 U1e.16 ; v1(20.8,15.4) C10e.1 ; v1@21.7,19.9 X1e.0@23.413,19.9 ; C10e.1@22.375,15.025 U1e.19 25.475,15.025 25.7,14.8 25.275,14.375 U1e.20 ; v1@22.4,4.4 C4e.1 ; U1e.22 v1(25.575,13.075) ; v1@24,4.4 R2e.1 ; C12e.1 v1(25.7,24.7) ; v1@26.5,5.8 C3e.1 ; v1(26.6,7.3) C2e.1 ; C9e.2 v1(28.3,21.3) ; U1e.2 30.375,9.825 v1(31.1,9.1) ; U1e.6 30.35,12.425 31,13.075 30.35,13.725 U1e.8 ; U1e.7 v1(31.175,13.075) ; U1e.14 v1(31.275,17.625) 31.775,17.625 C8e.1 v1(32.8,17.8) ; R3e.1 v1(32.1,19.4) ; v1(31.1,7.9) 31.5,8.3 L2e.1 ; v1(33.1,27) C2a.1 ; v1(33.1,28.7) C3a.1 ; C7e.1 v1@34.3,17.9 ; v1(35.1,34.8) 35.5,34.4 U3g.2 U3g.1 v1(36.4,35.8) ; v1(36.4,74.5) 36.8,74.9 U1d.24 ; U3g.5 U3g.6 v1(37.8,35.8) ; v1@37.91,6.19 U2f.12 ; v1@38,8.73 U2f.11 ; U2f.9@39.735,13.8 v1(41.5,13.8) ; v1(40.7,32.6) U2g.1@42.015,32.6 ; v1(40.7,39.4) C6g.1 ; v1@40.71,28.79 U2g.3 ; C8g.1@41.7,22.8 v1(41.7,24.3) ; v1(41.7,37.5) C5g.1 ; U2f.13@41.9,4.035 v1(41.9,5.7) ; U2f.8@41.9,15.985 v1(41.9,17.6) ; C7g.1 v1(43,25.4) ; U2f.7@44.4,16.005 v1(44.4,17.6) ; v1@46.45,24.95 U2g.5 ; U2f.15@46.9,4.095 v1(46.9,5.7) ; U2f.6@47,16.005 v1(47,17.6) ; C2g.1 v1(49.3,42.1) ; v1(48.1,24.9) U2g.6 ; C1g.1 48.4,37.5 v1(49.5,38.6) ; U2f.16@49.5,4.035 v1(49.5,5.7) ; U2f.5@49.5,15.985 v1(49.5,17.6) ; v1(50.1,13.7) U2f.4@51.565,13.7 ; v1@50.13,11.27 U2f.3 ; U2g.7 v1@52.19,28.79 ; U2g.9 v1@52.19,32.61 ; U2f.1 v1(53.375,6.19) ; C3g.1 v1@53.7,37.5 ; 54,84.1 v1@55.8,84.1 ; C4g.1 v1(56.4,39.4) ; v1@55.305,78.905 U2a.1 ; v1(56.3,9.9) U1a.2 ; v1(59.75,82.65) 59.75,84 ; R2g.2 v1@68.7,49.8 ; U1f.1 v1(72.595,20.095) ; U1g.4@71,48.305 v1(71,49.3) ; H2b.31 H2b.32 H2b.30 H2b.29 H2b.31
  BottomLayer w0.3: v1(2,51) 2.4,51.4 U1c.63 ; v1@3.4,59.2 5.2,57.4 v2(10,57.4) 11.112,57.4 11.7,57.987 U1c.89 ; U1c.38 11.2,45.3 11.8,45.9 v1@11.8,46.5 ; U1c.28 v1(16.2,45.5) ; R3g.1 18.2,42.2 v1(18.2,43.2) ; U1c.13 v1@20.2,51.4 ; U1c.10 19.9,52.9 v1(20.4,53.4) ; v1@20.5,50.3 20.9,50.7 C1c.1@21.6,50.7 ; v1(23,44.2) C2c.2 ; U2c.3 v1(24.5,47.7) ; v1(38.1,87.5) 38.1,86.3 C1d.1 v1@39.6,87.4 ; v1(77.6,82.7) P3a.6
  other v1: 10,3.6 22.4,4.5 24,4.5 15,5 19.2,5 25,5 31.1,5 35,5 40,5 50,5 55,5 61,5 65,5 70,5 75,5 80,5 85,5 26.6,5.8 38.1,6.19 38.1,8.73 5,10 10,10 26.7,10 45,10 50,10 55,10 75,10 80,10 85,10 50.1,11.3 56.3,14 60,14 89.6,14 84.5,14.1 25.5,14.7 5,15 15,15 20,15 36,15 40,15 45,15 65,15 70,15 75,15 80,15 34.3,17.8 21.6,19.9 5,20 15,20 20,20 35,20 45,20 50,20 56.3,20 60,20 70,20 75,20 80,20 84.5,24.2 89.6,24.2 46.4,24.9 5,25 15,25 20,25 25,25 30,25 35,25 50,25 56.3,25 60,25 65,25 70,25 75,25 81.1,25.8 41,26.4 81.5,28.1 40.7,28.8 52.2,28.8 89.6,29.3 5,30 15,30 20,30 25,30 30,30 35,30 45,30 56.3,30 60,30 65,30 70,30 75,30 52.2,32.6 84.5,34.4 89.6,34.4 5,35 15,35 19.4,35 41.1,35 50,35 55,35 60,35 65,35 70,35 75,35 25,35.6 30,35.6 2.6,37.4 53.6,37.5 8.5,38.4 84.5,39.5 30,40 35,40 50,40 55,40 60,40 65,40 70,40 75,40 22,42.5 19.3,44.5 25,45 30,45 35,45 40,45 50,45 55,45 60,45 63.8,45 44.4,45.6 2,46 11.8,46.4 15,47.5 2,48.6 68.6,49.8 15,50 25,50 30,50 35,50 40,50 45,50 50,50 55,50 60,50 75,50 20.3,50.2 20.3,51.4 65,51.7 84.4,52 89.6,52 25,55 30,55 35,55 40,55 45,55 50,55 55,55 60,55 65,55 70,55 75,55 30,58.9 35,59 40,59 3.3,59.2 45,60 50,60 55,60 60,60 65,60 70,60 75,61.6 3,61.7 84.5,62.2 89.6,62.2 75,63.8 3,64.7 5.4,65.4 45,70 50,70 55,70 60,70 65,70 90,70 65,72.7 72.6,72.8 55,72.9 60,72.9 33.1,73.3 50,73.7 70,75 80,75 5,76.1 52.6,77.8 55.4,78.905 35,79.6 5,80 60,80 65,80 15,80.3 20,80.3 70,81.1 10,81.2 80,81.3 57.2,81.4 37.2,82.4 39.7,82.4 55.6,84.1 10,85 15,85 20,85 25,85 44.3,85 60,85 85,85.6 90,85.6 61.2,87.2 64.4,87.2 39.6,87.5 44.3,87.5
  other v2: 44.3,28.7 45,28.7 45.7,28.7 46.4,28.7 47.1,28.7 47.8,28.7 48.5,28.7 44.3,29.4 45,29.4 45.7,29.4 46.4,29.4 47.1,29.4 47.8,29.4 48.5,29.4 44.3,30.1 45,30.1 45.7,30.1 46.4,30.1 47.1,30.1 47.8,30.1 48.5,30.1 44.3,30.8 45,30.8 45.7,30.8 46.4,30.8 47.1,30.8 47.8,30.8 48.5,30.8 44.3,31.5 45,31.5 45.7,31.5 46.4,31.5 47.1,31.5 47.8,31.5 48.5,31.5 44.3,32.2 45,32.2 45.7,32.2 46.4,32.2 47.1,32.2 47.8,32.2 48.5,32.2 44.3,32.9 45,32.9 45.7,32.9 46.4,32.9 47.1,32.9 47.8,32.9 48.5,32.9
HPAM_EN: C1g.2 C2g.2 R3g.2 U1c.29 U2g.11 | length 59.2
  TopLayer w0.3: v2(12.6,36.5) 13.2,35.9 15.3,35.9 16.8,37.4 20.4,37.4 23.3,34.5 33.6,34.5 38.3,39.2 38.3,40.9 40,42.6 v2(43.4,42.6) ; v2(46.1,41.1) 46.3,40.9 C1g.2@46.3,37.6 ; U2g.11@46.45,34.85 U2g.11
  TopLayer w0.8: U2g.11 46.45,38.05 C2g.2
  BottomLayer w0.3: v2(12.6,36.5) 14.6,36.5 16.2,38.1 R3g.2 15.7,42.4 U1c.29 ; v2@43.5,42.6 44.6,42.6 v2(46.1,41.1)
HPAM_TEMP: U1c.19 U3g.3 | length 30.6
  TopLayer w0.3: v2@20.2,36.5 22.8,33.9 U3g.3 U3g.3@36.65,33.9
  BottomLayer w0.3: U1c.19 20,48.4 20.2,48.2 ; v2(20,36.7) 20.2,36.9 20.2,48.2
LNA: U1f.6 U1f.7 U1f.8 U2f.10 | length 37.5
  TopLayer w1: U2f.10 44.17,11.27 v1(46.5,13.6) ; v1(63.872,16.772) 65.7,18.6 U1f.6@65.7,22.4
  BottomLayer w1: v1(44.9,12) 48.9,16 63.1,16 v1(65.6,18.5)
  other v1: 45.718,12.818 64.721,17.621
NetC1a_1: C1a.1 U2g.8 | length 22.3
  TopLayer w1: U2g.8 52.365,30.7 cw(c52.365,28.593) 54.472,28.593 ; C1a.1 54.5,28.593
NetC1a_2: C1a.2 U1a.1 | length 1.6
  TopLayer w0.8: C1a.2 U1a.1@57.8,11.1
NetC1e_1: C1e.1 U2f.14 | length 12.1
  TopLayer w0.7: C1e.1@37.6,10 42.849,10 cw(c42.849,8.419) 44.43,8.419 U2f.14
NetC2a_2: C2a.2 C6e.1 L1a.1 | length 17
  TopLayer w1: C2a.2 L1a.1 C6e.1
NetC3a_2: C3a.2 L1a.2 U2g.2 | length 8.2
  TopLayer w0.3: U2g.2@41.5,30.7 U2g.2 U2g.2@41.5,30.7
  TopLayer w1: C3a.2 L1a.2 ; L1a.2@37.6,28.8 cw(c39.5,28.8) 39.5,30.7 U2g.2
NetC4a_1: C4a.1 P1a.1 | length 4.8
  TopLayer w1.2: C4a.1 P1a.1
NetC4a_2: C4a.2 U1a.5 | length 1.6
  TopLayer w0.8: U1a.5 C4a.2
NetC5a_1: C5a.1 U2f.2 | length 2.8
  TopLayer w1: U2f.2@51.705,8.7 C5a.1
NetC5a_2: C5a.2 U1a.3 | length 1.6
  TopLayer w0.8: C5a.2 U1a.3@57.8,8.7
NetC10e_2: C10e.2 L4e.1 U1e.21 | length 3.5
  TopLayer w0.3: L4e.1@20.425,13.725 U1e.21
NetC11e_2: C11e.2 U1e.17 X1e.1 | length 7.6
  TopLayer w0.3: C11e.2 18.7,17 19.375,16.325 U1e.17
  TopLayer w0.8: C11e.2 X1e.1@18.7,19.112
NetC12e_2: C12e.2 U1e.18 X1e.2 | length 10.6
  TopLayer w0.3: U1e.18 25.175,15.675 ; 25.15,15.7 25.8,16.35 25.8,16.475 25.775,16.5
  TopLayer w0.8: X1e.2@22.7,23.413 C12e.2 ; X1e.2@23.813,22.3 24.4,22.3 25.775,20.925 25.775,16.5
NetD1a_2: D1a.2 R3a.1 | length 1.6
  TopLayer w0.3: D1a.2 R3a.1
NetD2a_2: D2a.2 R4a.1 | length 1.6
  TopLayer w0.3: D2a.2 R4a.1
NetL5e_1: L5e.1 U1e.11 | length 2
  TopLayer w0.3: U1e.11 30.775,15.675 L5e.1
NetL5e_2: L5e.2 U1e.10 | length 2
  TopLayer w0.3: U1e.10 30.775,15.025 L5e.2
NetP2a_1: P2a.1 R1a.2 | length 7.2
  TopLayer w1: R1a.2 P2a.1
NetR1a_1: R1a.1 U2a.6 U2a.7 U2a.8
NetR1e_2: R1e.2 R2e.2 U1e.28 | length 4.6
  TopLayer w0.3: R2e.2@23.9,7.3 R1e.2 22.4,8.7 22.875,9.175 U1e.28
NetR2c_1: R2c.1 U1c.5 | length 3.1
  BottomLayer w0.3: U1c.5 R2c.1@21.8,55.4
NetR2g_1: R2g.1 U1g.5 | length 1.3
  TopLayer w0.8: U1g.5@65.7,48.5 R2g.1
NetR3e_2: R3e.2 U1e.13 | length 3.9
  TopLayer w0.3: R3e.2@29,19.3 28.1,18.4 28.1,17.3 28.425,16.975 U1e.13
NetU1c_20: U1c.20
NetU1c_21: U1c.21
NetU1c_22: U1c.22
NetU1c_23: U1c.23
NetU1c_24: U1c.24
NetU1c_25: U1c.25
NetU1c_39: U1c.39 | length 87
  TopLayer w0.3: v2(11.4,42.2) 9,42.2 7.3,40.5 7.3,39.9 6.3,38.9 4.3,38.9 3.2,40 3.2,44.7 4.6,46.1 4.6,66.9 3,68.5 3,71.9 10.5,79.4 21.4,79.4 v2(28.1,86.1) ; 34.8,86.1 v2(36.7,86.1)
  BottomLayer w0.3: U1c.39 10.7,42.8 v2@11.4,42.1 ; v2(28.1,86.1) v2(36.7,86.1)
NetU1c_40: U1c.40 | length 82.2
  TopLayer w0.3: v2(11.4,41.2) v2(24.5,41.2) ; v2(41.4,81.5) 42.4,81.5 49,88.1 54,88.1
  BottomLayer w0.3: U1c.40 10.2,42.3 v2@11.2,41.3 ; v2(24.5,41.2) 26.2,41.2 27,42 27,55 27,59.2 34,66.2 38.2,66.2 41.4,69.4 v2(41.4,81.5)
NetU1c_41: U1c.41 | length 82.7
  TopLayer w0.3: v2(10.7,40.5) v2(25.2,40.5) ; v2@42.7,80.2 49.6,87.1 54,87.1
  BottomLayer w0.3: U1c.41 9.7,42 10.7,41 v2(10.7,40.5) ; v2(25.2,40.5) 26.9,40.5 27.5,41.1 27.5,54.7 27.5,58.8 34.3,65.6 38.4,65.6 41.9,69.1 41.9,79.65 v2(42.5,80.25)
NetU1c_65: U1c.65
NetU1c_66: U1c.66
NetU1c_67: U1c.67
NetU1c_68: U1c.68
NetU1c_69: U1c.69
NetU1c_70: U1c.70
NetU1c_71: U1c.71
NetU1c_72: U1c.72
NetU1c_73: U1c.73
NetU1c_74: U1c.74
NetU1c_75: U1c.75
NetU1c_76: U1c.76
NetU1c_77: U1c.77
NetU1e_12: U1e.12
PALE: U1c.35 U1e.27 | length 48.9
  TopLayer w0.3: v2(11.2,12.6) 11.2,10.8 12.175,9.825 U1e.27
  BottomLayer w0.3: v2(11.2,12.6) 8.7,15.1 8.7,36.5 12.7,40.5 U1c.35
PCLK: U1c.36 U1e.25 | length 48.1
  TopLayer w0.3: v2(12.9,11.6) 13.375,11.125 U1e.25
  BottomLayer w0.3: U1c.36 12.2,40.8 8.2,36.8 8.2,14.5 11.1,11.6 v2(12.9,11.6)
PDATA: U1c.34 U1e.26 | length 47.6
  TopLayer w0.3: v2(12.2,12.6) 12.2,11 12.725,10.475 U1e.26
  BottomLayer w0.3: v2(12.2,12.6) 9.3,15.5 9.3,36.2 13.2,40.1 U1c.34
RF_IN: C1e.2 L2e.2 U1e.3 | length 6.4
  TopLayer w0.3: U1e.3 L2e.2@32.325,10.475
  TopLayer w0.4: 30.6,10.4 31,10
  TopLayer w1: L2e.2@32.9,10.1 C1e.2
RF_OUT: C5e.1 C6e.2 L3e.1 U1e.4 | length 8.1
  TopLayer w0.3: U1e.4 L3e.1@32.425,11.125 ; L3e.1@32.5,11.4 31.675,11.4 31.875,11.6 L3e.1
  TopLayer w1: L3e.1 C6e.2
RSSI: C4e.2 R1e.1 U1c.18 | length 56.6
  TopLayer w0.3: v2(15,9) 19,9 R1e.1 C4e.2
  BottomLayer w0.3: v2(15,9) 15,13 11.1,16.9 11.1,35.1 11.7,35.7 14.537,35.7 16.462,37.625 19,40.163 19,43.6 17.2,45.4 17.2,48.6 17.5,48.9 U1c.18
RX0: H1b.40 U1c.62 | length 130.6
  TopLayer w0.3: v2(9.5,55.6) 9.2,55.9 9.2,60.2 9.7,60.7 14.8,60.7 20.5,66.4 38.4,66.4 40.7,68.7 79.4,68.7 81.6,66.5 81.6,32.7 82.5,31.8 84,31.8 84.5,31.3 84.5,29.18 H1b.40
  BottomLayer w0.3: U1c.62 5,50.9 v2@9.6,55.5
SCL0: H1b.43 U1c.59 | length 164.3
  TopLayer w0.3: v2(10.8,53.9) 12.3,55.4 12.3,55.8 21.3,64.8 39.2,64.8 41.6,67.2 72.2,67.2 72.6,66.8 v2(73.9,66.8) 78.2,66.8 78.5,66.8 80.1,65.2 80.1,25.6 H1b.43@82.85,22.85
  BottomLayer w0.3: U1c.59 6.3,49.4 v2(10.8,53.9) ; 61,82.5 61.7,81.8 65.1,81.8 67.8,79.1 67.8,62.4 68.9,61.3 72.1,61.3 72.9,62.1 72.9,65.8 v2(73.9,66.8)
SDA0: H1b.41 U1c.60 | length 160.9
  TopLayer w0.3: v2(10.8,54.9) 11.8,55.9 11.8,56.1 21,65.3 38.9,65.3 41.3,67.7 72.9,67.7 v2(73.1,67.5) 78.7,67.5 80.6,65.6 80.6,27.7 H1b.41@83.15,25.15
  BottomLayer w0.3: U1c.60 5.8,49.9 v2(10.8,54.9) ; 62.2,82.5 65.2,82.5 68.4,79.3 68.4,62.7 69.2,61.9 71.9,61.9 72.3,62.3 72.3,66.7 v2(73.1,67.5)
TCK: P3a.3 R1c.1 U1c.2 | length 100.6
  TopLayer w0.3: v2(21.5,59.2) 24.6,62.3 40.8,62.3 43.2,64.7 70.3,64.7 70.7,64.3 v2(70.7,63.4) ; v2(70.7,70.1) v2(73.5,70.1) ; v2(73.8,85.6) R1c.1
  BottomLayer w0.3: U1c.2 19.8,56.9 20.1,57.2 20.1,57.8 v2(21.5,59.2) ; v2(70.7,63.4) v2(70.7,70.1) ; P3a.3@73.8,84.15 v2(73.8,85.6) ; P3a.3 73.85,82.65 74.6,81.9 74.6,71.2 v2(73.5,70.1) 74.2,69.4 80.4,69.4 82.5,67.3 89.56,67.3
TDI: P3a.4 U1c.3 | length 97.3
  TopLayer w0.3: v2(21.5,58.2) 25.1,61.8 41.2,61.8 43.6,64.2 69.5,64.2 69.9,63.8 v2(69.9,62.7) ; v2(69.9,69.4) 74.2,69.4 v2(75.1,70.3) 75.4,70.6 79,70.6 82.3,67.3 83.8,67.3 84.4,66.7 84.4,65.4 85,64.8 86.98,64.8
  BottomLayer w0.3: U1c.3 20.1,56.4 20.7,57 20.7,57.4 v2(21.5,58.2) v2@21.4,58.1 ; v2(69.9,62.7) v2(69.9,69.4) ; v2(75.1,70.3) P3a.4
TDO: P3a.5 U1c.4 | length 100.9
  TopLayer w0.3: v2(21.5,57.2) 25.6,61.3 41.5,61.3 43.9,63.7 68.8,63.7 v2(69.1,63.4) ; v2(69.9,70.7) 71,71.8 v2(75.8,71.8) 80.9,71.8 81.5,72.4 83.9,72.4 84.5,71.8 84.5,70.4 85,69.9 89,69.9 89.6,69.3 89.6,64.72
  BottomLayer w0.3: U1c.4 20.313,55.9 v2@21.369,56.956 ; v2(69.1,63.4) 69.1,69.9 v2(69.9,70.7) ; v2(75.8,71.8) 75.6,72 75.6,81.8 76.35,82.55 P3a.5
TMS: P3a.2 U1c.1 | length 98
  TopLayer w0.3: v2@21.35,60.35 23.8,62.8 40.4,62.8 42.8,65.2 71,65.2 71.5,64.7 v2(71.5,62.7) ; v2(73.5,71.1) 80.63,71.1 81.93,69.8 83.7,69.8 84.5,69 84.5,68.1 85.3,67.3 87.02,67.3
  BottomLayer w0.3: U1c.1 18.75,57.55 v2@21.45,60.25 ; v2(71.5,62.7) 71.5,70.6 72,71.1 v2(73.5,71.1) ; P3a.2 72.6,83.1 74.1,81.6 74.1,71.8 v2@73.4,71.1
  other v2: 21.5,60.2
TX0: H1b.39 U1c.61 | length 124.8
  TopLayer w0.3: v2(10.8,55.9) 20.7,65.8 38.6,65.8 41,68.2 79,68.2 81.1,66.1 81.1,29.7 H1b.39@83,27.8
  BottomLayer w0.3: U1c.61 5.3,50.4 v2(10.8,55.9)
VBAT: H2b.45 H2b.46 R2a.2 R6a.2 U2a.2 U2a.3 | length 105.5
  TopLayer w0.5: 81.7,74.9 v2(84.7,74.9) ; v2(89.6,74.9) 91.7,74.9 93.6,73 93.6,21.4
  TopLayer w0.6: U2a.3 58.735,76.365 61.1,74 75.13,74 76.9,74 77.4,73.5 80.3,73.5 81.7,74.9
  TopLayer w0.8: H2b.46 92.52,20.32 93.6,21.4
  TopLayer w1.5: R6a.2@79,32 79,24.1 81.7,21.4
  BottomLayer w0.5: v2(84.7,74.9) v2(89.6,74.9)
VCC_HPA: C3g.2 C4g.2 C5g.2 C6g.2 C7g.2 C8g.2 U1g.6 U1g.7 U2g.4 U2g.10 U2g.12 | length 82.7
  TopLayer w0.8: C8g.2@44.8,22.5 U2g.4 ; U2g.12 C6g.2@44.8,39.3 ; U2g.10 C3g.2@50.475,37.5 ; C3g.2 50.7,38.1 C4g.2@52.1,39.5
  TopLayer w1.2: v2(39.4,23.2) v2(39.4,21.6) 40.5,20.5 43.7,20.5 44.9,21.7 C8g.2 ; v2(39.4,37.2) 39.4,40.3 40.4,41.3 44.2,41.3 44.8,40.7 ; C6g.2@44.8,39.3 44.8,40.7 ; 66.4,46.3 47.5,46.3 44.8,43.6 44.8,40.7
  TopLayer w1.5: C4g.2 52.1,46.1
  BottomLayer w1.2: v2(39.4,21.6) v2(39.4,38.8)
  other v2: 39.4,22.4 39.4,38 42.3,41.3 43.1,41.3 43.9,41.3
VCC_RF: R1f.2 R1g.1 R5a.1 R6a.1 U1f.2 U1f.3 U1g.1 U1g.2 | length 35.6
  TopLayer w0.5: U1f.2 71.865,21.365 R1f.2 ; U1f.3 R1f.2@72.865,22.635
  TopLayer w1: R1f.2@73.1,22.5 75.4,22.5 77.2,24.3 R5a.1
  TopLayer w1.2: U1g.2@70.9,45.4 71.4,44.9 75.7,44.9 77.2,43.4 R5a.1
VREF: U1c.15 U1c.16 U1c.17 U2c.2 | length 3.7
  BottomLayer w0.3: U1c.15 U1c.17 20.425,49.4 U2c.2
pads on no net: H1b.1 H1b.2 H1b.3 H1b.4 H1b.5 H1b.6 H1b.7 H1b.8 H1b.9 H1b.10 H1b.11 H1b.12 H1b.13 H1b.14 H1b.15 H1b.16 H1b.17 H1b.18 H1b.19 H1b.20 H1b.21 H1b.22 H1b.23 H1b.24 H1b.25 H1b.26 H1b.27 H1b.28 H1b.30 H1b.31 H1b.32 H1b.33 H1b.34 H1b.35 H1b.36 H1b.37 H1b.38 H1b.42 H1b.44 H1b.45 H1b.46 H1b.47 H1b.48 H1b.49 H1b.50 H1b.51 H1b.52 H2b.1 H2b.2 H2b.3 H2b.4 H2b.5 H2b.6 H2b.7 H2b.8 H2b.9 H2b.10 H2b.11 H2b.12 H2b.13 H2b.14 H2b.15 H2b.16 H2b.17 H2b.18 H2b.19 H2b.20 H2b.21 H2b.22 H2b.23 H2b.24 H2b.25 H2b.26 H2b.33 H2b.34 H2b.35 H2b.36 H2b.37 H2b.38 H2b.39 H2b.40 H2b.41 H2b.42 H2b.43 H2b.44 H2b.47 H2b.48 H2b.49 H2b.50 H2b.51 H2b.52 P3a. U1c.6 U1c.7 U1c.8 U1c.9 U1c.12 U1c.14 U1c.26 U1c.27 U1c.99 U1c.100 U1f.5 U1g.8 U2a.5
copper on no net:
  other v1: 15,82.2 20,82.2 10,87.4 15,87.4 20,87.4 25,87.4

## Polygon pours and split planes (outlines as drawn)
+3.3V on BottomLayer "TopLayer-No Net" (solid, remove dead copper, pour order 1000): 92.72,44.8 80.4,44.8 80.4,41.9 92.72,41.9
GND on BottomLayer "TopLayer-No Net" (solid, remove dead copper, pour order 1000): 0.338,-0.255 96.238,-0.255 96.238,89.905 96.228,89.915 0.338,89.915
VBAT on TopLayer "TopLayer-No Net" (solid, remove dead copper, pour order 1000): 91.9,22 81,22 81,18.6 91.9,18.6
GND on TopLayer "TopLayer-No Net" (solid, remove dead copper, pour order 1001): 0.118,0.058 96.018,0.058 96.018,90.218 96.008,90.228 0.118,90.228

## Keep-outs
KeepOutLayer:
  lines w0.203: 1.27,1.27 94.62,1.27 94.62,88.9 1.27,88.9 1.27,1.27

## Other copper
TopLayer:
  rectangle net VBAT: 54.7,76.2 58.2,77.635
  rectangle net NetR1a_1: 62.3,76.3 64.7,78.9
  region net RF_IN: 33,10.475 30.91,10.475 30.91,9.8 33,9.8
  region net RF_OUT: 32.5,11.4 30.3,11.4 30.3,11.125 32.5,11.125
  rectangle net AVDD: 32.8,13.3 34.3,14.9
  rectangle net GND: 43.2,27.6 49.6,33.9
BottomLayer:
  rectangle net GND: 42.25,26.5 50.65,34.9

## Silkscreen, mask and mechanical layers (free items; w line width, h text height)
TopOverlay:
  text "RX" at 73.4,61 h1.52
  text "TX" at 73.4,55.8 h1.52
  text "LibreCube LC-2301a" at 94.2,13.4 h1.52 r90
BottomOverlay:
  text "P3" at 79.9,82.6 h1.52
Mechanical1:
  lines w0.203: 0,0 95.89,0 95.89,90.17 0,90.17 0,0